# Altium PCB ByteBlaster II.PcbDoc
Units mm, origin at the board's own origin, x right, y up, seen from the top; angles counter-clockwise.
Board outline 50.1 x 27.9 mm, 2 copper layers (Top Layer, Bottom Layer), stack 0.171 mm thick; 46 components, 49 nets, 187 pads, 28 vias.
Unrouted connection lines stored in the file: 1.
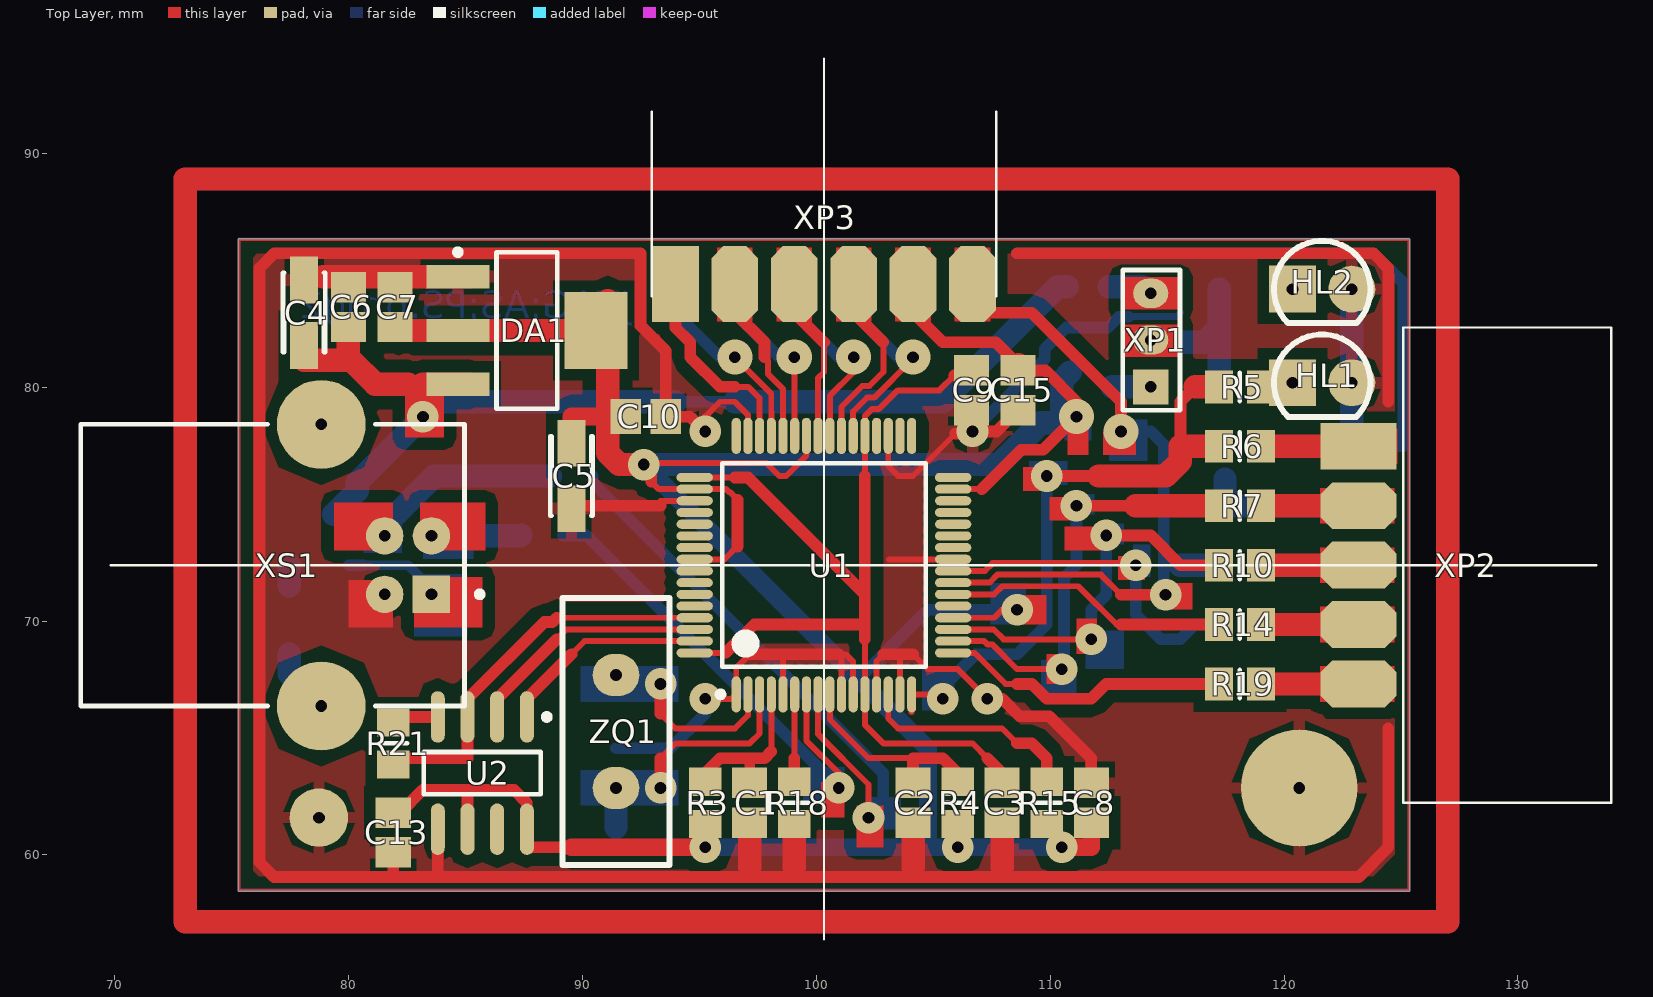
[diagram p0: Top Layer view]
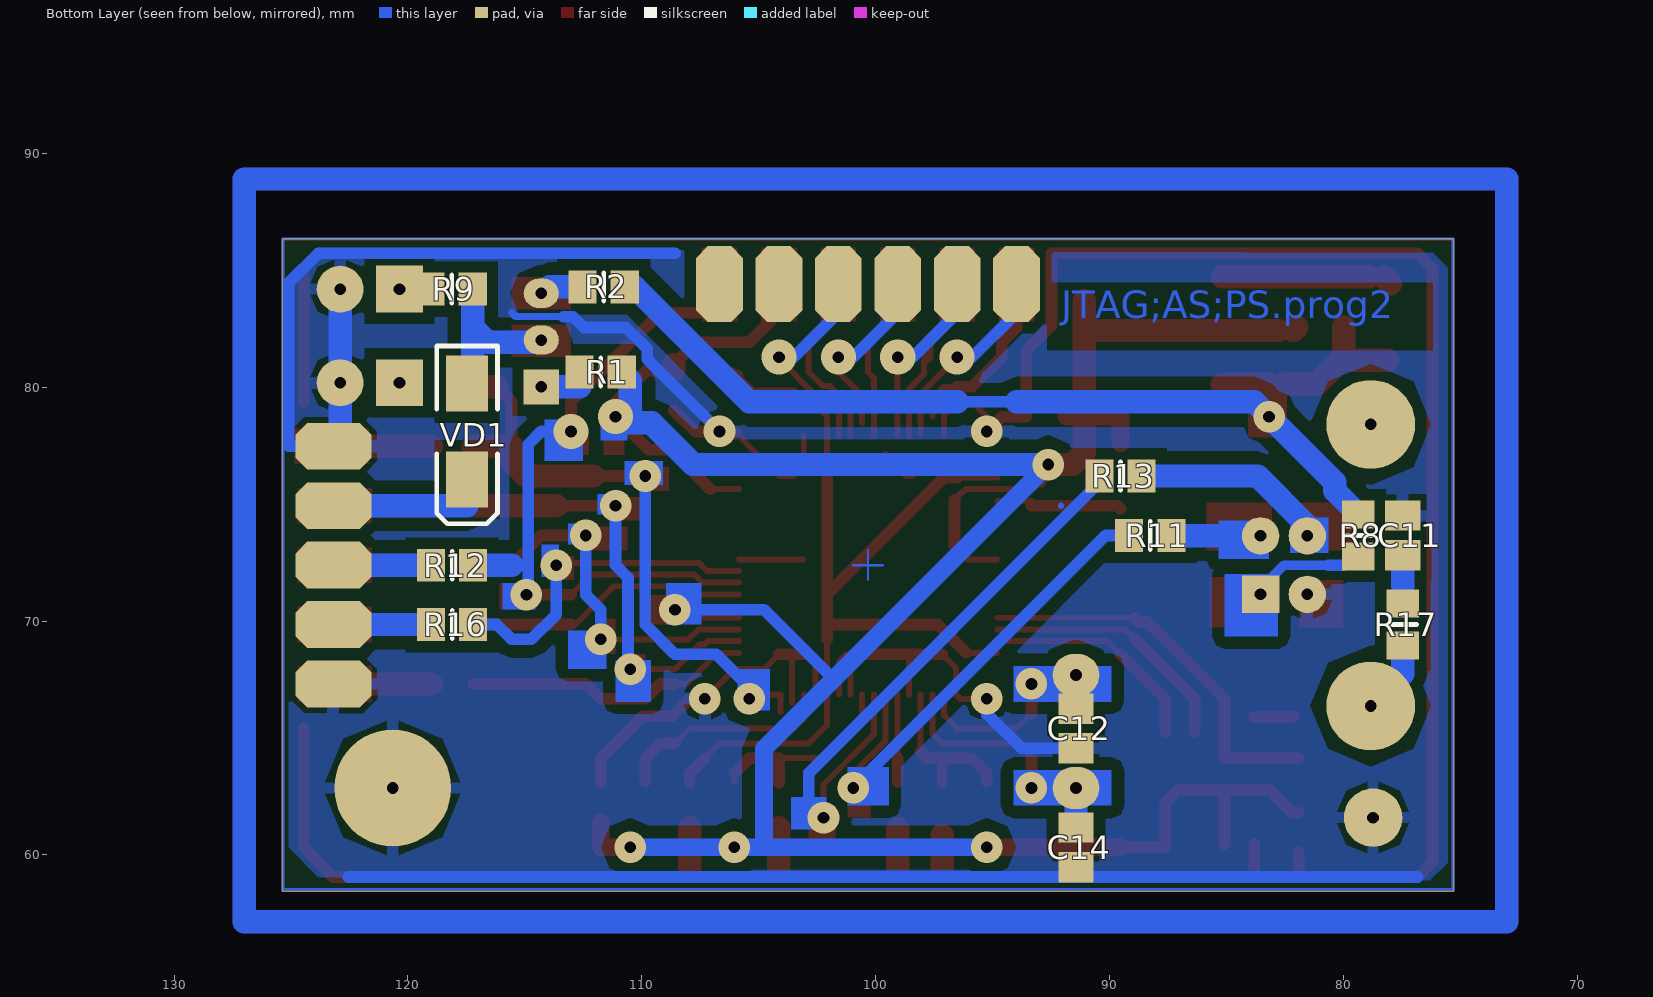
[diagram p1: Bottom Layer view, seen from below]

## Layer stack, top to bottom
Top Solder: solder mask 0.0102, Solder Resist, Dk 3.5
Top Layer: signal copper 0.0356
Dielectric 1: dielectric 0.1, FR-4, Dk 4.8
Bottom Layer: signal copper 0.0356
Bottom Solder: solder mask 0.0102, Solder Resist, Dk 3.5

## Board outline
75.28,58.49 ccw(c75.33,58.49) 75.33,58.44 125.33,58.44 ccw(c125.33,58.49) 125.38,58.49 125.38,86.29 ccw(c125.33,86.29) 125.33,86.34 75.33,86.34 ccw(c75.33,86.29) 75.28,86.29

## Design rules (kind name [scope] priority, off if disabled: settings)
Clearance Clearance_2 [U1] p1: gap=0.2
Clearance Clearance_1 [InNamedPolygon('Bottom Layer-No Net')] p2: gap=0.5
Clearance Clearance_Poly [InPoly] p3: gap=0.5
PolygonConnect [All] p1: connectstyle=Relief reliefconductorwidth=0.5 reliefentries=4 polygonreliefangle="90 Angle" airgapwidth=0.254
RoutingVias [All] p1: holewidth=0.711 width=1.27 viastyle="Through Hole" minholewidth=0.711 minwidth=1.27 maxholewidth=0.711 maxwidth=1.27
SolderMaskExpansion [All] p1: expansion=0.102
Width [All] p1: maxlimit=3 minlimit=0.254 preferedwidth=0.254
30 further rules are at their usual default settings.

## Components (designator, comment, footprint, x,y, rotation, side; value= is the part's Value field where it differs from the comment)
C1 "1uF" CAPC2012(0805)N 97.155,62.23 r90 top
C2 "1uF" CAPC2012(0805)N 104.14,62.23 r90 top
C3 "1uF" CAPC2012(0805)N 107.95,62.23 r90 top
C4 "10uF" CAPC3216(1206)(A) 78.105,83.185 r90 top
C5 "10uF" CAPC3216(1206)(A) 89.535,76.2 r270 top
C6 "0.1uF" CAPC2012(0805)N 79.995,83.42 r270 top
C7 "0.1uF" CAPC2012(0805)N 81.995,83.42 r270 top
C8 "1uF" CAPC2012(0805)N 111.76,62.23 r270 top
C9 "1uF" CAPC2012(0805)N 106.63,79.865 r90 top
C10 "1uF" CAPC2012(0805)N 92.71,78.74 r180 top
C11 "0.1uF" CAPC2012(0805)N 77.47,73.66 r270 bottom
C12 "27p" CAPC2012(0805)N 91.44,65.405 r270 bottom
C13 "0.1uF" CAPC2012(0805)N 81.915,60.96 r90 top
C14 "27p" CAPC2012(0805)N 91.44,60.325 r270 bottom
C15 "0.1uF" CAPC2012(0805)N 108.63,79.865 r90 top
DA1 "LD1117S33T" SOT223_M 87.63,82.42 r0 top
HL1 "LED" "LED 5mm Red" 121.63,80.19 r0 top
HL2 "LED" "LED 5mm Red" 121.63,84.19 r0 top
R1 "30" RESC2012(0805)N 111.76,80.645 r0 bottom
R2 "30" RESC2012(0805)N 111.63,84.285 r0 bottom
R3 "0" RESC2012(0805)N 95.25,62.23 r90 top
R4 "0" RESC2012(0805)N 106.045,62.23 r90 top
R5 "520" RESC2012(0805)N 118.11,80.01 r0 top
R6 "75" RESC2012(0805)N 118.11,77.47 r0 top
R7 "75" RESC2012(0805)N 118.11,74.93 r0 top
R8 "30" RESC2012(0805)N 79.375,73.66 r270 bottom
R9 "520" RESC2012(0805)N 118.13,84.19 r180 bottom
R10 "75" RESC2012(0805)N 118.11,72.39 r0 top
R11 "30" RESC2012(0805)N 88.265,73.66 r180 bottom
R12 "75" RESC2012(0805)N 118.11,72.39 r0 bottom
R13 "30" RESC2012(0805)N 89.535,76.2 r180 bottom
R14 "75" RESC2012(0805)N 118.11,69.85 r0 top
R15 "1k" RESC2012(0805)N 109.855,62.23 r270 top
R16 "75" RESC2012(0805)N 118.11,69.85 r0 bottom
R17 "510k" RESC2012(0805)N 77.47,69.85 r270 bottom
R18 "12k" RESC2012(0805)N 99.06,62.23 r90 top
R19 "75" RESC2012(0805)N 118.11,67.31 r0 top
R21 "2k" RESC2012(0805)N 81.915,64.77 r90 top
U1 "FT2232HL-Reel" LQFP-64_L 100.33,72.39 r90 top locked
U2 "AT93C46DN-SP25-T" 8S1_N 85.725,63.5 r270 top
VD1 "Diode" SMA 117.475,78.105 r270 bottom
XP1 "XP-3_Jump" PLS-3-2 114.3,80.01 r0 top
XP2 "XP-10" BH-10_edge_board 123.19,77.47 r270 top locked
XP3 "PLD-12-2_edge_board" PLD-12-2_edge_board 93.98,84.4 r0 top locked
XS1 "XS-5" USB2.5-2H4D 82.55,72.39 r180 top locked
ZQ1 "12MHz" HC-49/S 91.44,62.865 r90 top

## Footprints (in the part's own frame and the unit in brackets; to place one, negate y for a bottom-side part, rotate by r counter-clockwise, add the part's x,y. Pads: shape width x height; smd on the part's side, far side on the other; paste and mask are expansions set on the pad)
8S1_N [mm] "SOIC, 8-Leads, Body 4.9x3.9mm, Pitch 1.27mm, IPC Medium Density"
  oval 2.2x0.6 smd: 1(-2.4,1.905) 2(-2.4,0.635) 3(-2.4,-0.635) 4(-2.4,-1.905) 5(2.4,-1.905) 6(2.4,-0.635) 7(2.4,0.635) 8(2.4,1.905)
  silkscreen extent -2.52,-2.5 0.9,2.88, body extent -2,-2.5 2,2.5, height 1.75
BH-10_edge_board [mm]
  rect 2x3.25 smd: 1(0,0)
  oct 2x3.25 smd far side: 2(0,0) 4(2.54,0) 6(5.08,0) 8(7.62,0) 10(10.16,0)
  oct 2x3.25 smd: 3(2.54,0) 5(5.08,0) 7(7.62,0) 9(10.16,0)
  silkscreen extent -5.08,1.9 15.24,10.8, body extent -5.17,-1.3 15.33,10.8, height 4.28
CAPC2012(0805)N [mm] "Chip Capacitor, Body 2.0x1.3mm, IPC Medium Density"
  rect 1.3x1.5 smd: 1(-0.85,0) 2(0.85,0)
  body extent -1.02,-0.64 0.98,0.62, height 0.78
CAPC3216(1206)(A) [mm] "Capacitor, SM Tantalum; Body 3.2 x 1.6 mm (LxW typ)"
  rect 2x1.2 smd: 1(-1.4,0) 2(1.4,0)
  silkscreen extent -1.7,-0.9 1.7,0.9
HC-49/S [mm]
  oval 1.8x2 hole 0.5: 1(0,0) 2(4.826,0)
  silkscreen extent -3.3,-2.29 8.13,2.29, body extent -3.26,-2.32 8.08,2.33, height 3.6
"LED 5mm Red" [mm] "красный\матовый"
  rect 2x2 hole 0.5: 1(-1.27,0)
  round 2 hole 0.5: 2(1.27,0)
  silkscreen extent -2.06,-1.46 2.06,2.06, body extent -1.99,-1.5 1.99,1.99, height 5.88
LQFP-64_L [mm] "Thin QFP, 64-Leads, Body 10x10mm, Pitch 0.5mm, IPC High Density"
  oval 1.55x0.39 smd: 1(-5.525,3.75) 2(-5.525,3.25) 3(-5.525,2.75) 4(-5.525,2.25) 5(-5.525,1.75) 6(-5.525,1.25) 7(-5.525,0.75) 8(-5.525,0.25) 9(-5.525,-0.25) 10(-5.525,-0.75) 11(-5.525,-1.25) 12(-5.525,-1.75) 13(-5.525,-2.25) 14(-5.525,-2.75) 15(-5.525,-3.25) 16(-5.525,-3.75) 33(5.525,-3.75) 34(5.525,-3.25) 35(5.525,-2.75) 36(5.525,-2.25) 37(5.525,-1.75) 38(5.525,-1.25) 39(5.525,-0.75) 40(5.525,-0.25) 41(5.525,0.25) 42(5.525,0.75) 43(5.525,1.25) 44(5.525,1.75) 45(5.525,2.25) 46(5.525,2.75) 47(5.525,3.25) 48(5.525,3.75)
  oval 0.39x1.55 smd: 17(-3.75,-5.525) 18(-3.25,-5.525) 19(-2.75,-5.525) 20(-2.25,-5.525) 21(-1.75,-5.525) 22(-1.25,-5.525) 23(-0.75,-5.525) 24(-0.25,-5.525) 25(0.25,-5.525) 26(0.75,-5.525) 27(1.25,-5.525) 28(1.75,-5.525) 29(2.25,-5.525) 30(2.75,-5.525) 31(3.25,-5.525) 32(3.75,-5.525) 49(3.75,5.525) 50(3.25,5.525) 51(2.75,5.525) 52(2.25,5.525) 53(1.75,5.525) 54(1.25,5.525) 55(0.75,5.525) 56(0.25,5.525) 57(-0.25,5.525) 58(-0.75,5.525) 59(-1.25,5.525) 60(-1.75,5.525) 61(-2.25,5.525) 62(-2.75,5.525) 63(-3.25,5.525) 64(-3.75,5.525)
  silkscreen extent -5.65,-4.35 4.35,4.55, body extent -5,-5 5,5, height 1.6
PLD-12-2_edge_board [mm] "Connector; Header; 6x2 Position"
  rect 2x3.25 smd: 1(0,0)
  oct 2x3.25 smd far side: 2(0,0) 4(2.54,0) 6(5.08,0) 8(7.62,0) 10(10.16,0) 12(12.7,0)
  oct 2x3.25 smd: 3(2.54,0) 5(5.08,0) 7(7.62,0) 9(10.16,0) 11(12.7,0)
  silkscreen extent -1.02,-0.51 13.72,7.37, body extent -1,-0.59 13.7,7.41, height 2.1
PLS-3-2 [mm] "Connector; Header; 1x3 Position"
  rect 1.5x1.5 hole 0.5: 1(0,0)
  oval 1.5x1.25 hole 0.5: 2(0,2) 3(0,4)
  silkscreen extent -1.2,-1 1.25,5, body extent -1.2,-1 1.2,5, height 5.5
RESC2012(0805)N [mm] "Chip Resistor, Body 2.0x1.3mm, IPC Medium Density"
  rect 1.2x1.4 smd: 1(-0.9,0) 2(0.9,0)
  silkscreen extent 0,-0.6 0,0.6, body extent -1,-0.62 1,0.63, height 0.78
SMA [mm] "DO-214-AC/SMA; 2 C-Bend Leads; Body 5 x 2.7 mm, inc. leads (LxW)"
  rect 2.4x1.8 smd: 1(-2.05,0) 2(2.05,0)
  silkscreen extent -3.65,-1.3 3.95,1.3, body extent -2.75,-1.4 2.75,1.4, height 2.6
SOT223_M [mm] "SOT223, 4-Leads, Body 6.5x3.5mm, Pitch 2.3mm, Lead Span 7mm, IPC Low Density"
  rect 2.7x1 smd: 1(-2.95,2.3) 2(-2.95,0) 3(-2.95,-2.3)
  rect 2.7x3.3 smd: 4(2.95,0)
  silkscreen extent -3.07,-3.35 1.3,3.47, body extent -1.85,-3.35 1.85,3.35, height 1.7
USB2.5-2H4D [mm] "Connector; USB1.1, Type B, Thru-Hole; 4 Position; Right Angle"
  rect 1.6x1.6 hole 0.5: 1(-1,1.25)
  round 1.6 hole 0.5: 2(-1,-1.25) 3(1,-1.25) 4(1,1.25)
  round 3.8 hole 0.5: 5(3.71,6.02) 6(3.71,-6.02)
  silkscreen extent -3.18,-6.02 13.99,6.02, body extent -2.41,-6.02 13.99,6.02, height 11.1

## Part data
C1 C2 C3 C6 C7 C8 C9 C10 C11 C12 C13 C14 C15: library part CAPCC2012[0805]
C4 C5: library part CapTantA
HL1 HL2: library part "FYL-5013 HD"
R1 R2 R3 R4 R5 R6 R7 R8 R9 R10 R11 R12 R13 R14 R15 R16 R17 R18 R19 R21: library part RESC3216(1206), "Resistor"
U1: library part FT2232HL-R, "Dual High Speed USB To Multipurpose UART/FIFO IC, LQFP-64, Tape and Reel"
U2: "1Kbit (128 x 8 or 64 x 16), 3-wire Bus Serial Automotive EEPROM, 2.5V, 8-Pin SOIC, Tape & Reel"
VD1: library part SS14, "Диод Шоттки 1A 40В [SMA / DO-214AC]"
XP2: library part BH-10_edge_board
XS1: library part USB2.5-2H4D
ZQ1: library part "Crystal HC-49/S"

## Free pads (board coordinates)
  round 2.5 hole 0.5: 0(78.74,61.595)
  round 5 hole 0.5: 0(120.65,62.865)

## Via types
v1: diameter 1.35, hole 0.5, Top Layer to Bottom Layer, 22 vias
v2: diameter 1.5, hole 0.5, Top Layer to Bottom Layer, 6 vias

## Nets (pads, with @x,y where several pads share a name; then routed paths per layer and width w, separated by ;. In a path a pad name is that pad's centre, name@x,y a point inside that pad or via, vN(x,y) a via of type N, cw(c..) or ccw(c..) an arc to the next point about the centre after c; other vN are vias at no path point)
+1.8V: C3.2 C9.2 U1.12 U1.37 U1.49 U1.64 | length 44.8
  Top Layer w0.254: U1.64 96.135,68.64 ; U1.49 96.52,76.14 ; 102.03,71.19 102.08,71.19 ; 102.08,69.215 U1.12 102.08,65.56 102.87,64.77 106.68,64.77 107.315,64.135 ; 102.08,75.74 102.08,77.015 ; 102.08,76.2 102.08,77.015 ; C9.2 106.115,80.715 105.9,80.5 105.265,79.865 103.487,79.865 102.679,79.057 102.376,79.057 102.08,78.761 U1.37 102.08,77.015
  Top Layer w0.5: 96.135,68.64 97.345,69.85 102.08,69.85 ; 96.52,76.14 97.08,76.14 102.03,71.19 102.08,71.14 102.08,69.85 ; 102.08,69.215 102.08,69.85 ; 102.08,71.19 102.08,76.2 ; C9.2@105.9,80.5 C9.2@106.63,80.5 ; 107.315,64.135 107.95,63.5 C3.2
+3.3V: C5.1 C7.2 C8.2 C10.2 C13.2 C15.2 DA1.2 DA1.4 R1.1 R3.1 R4.1 R15.2 U1.20 U1.31 U1.42 U1.50 U1.56 U2.6 U2.8 XP3.9 | length 142.2
  Top Layer w0.254: 92.95,75.96 93.27,75.64 U1.50 96.147,75.64 96.264,75.523 96.297,75.523 96.63,75.19 ; v1@93.12,76.757 97.868,76.757 98.425,76.2 98.711,76.2 99.572,77.061 99.572,77.132 99.58,77.14 ; U1.56 96.08,72.64 96.63,73.19 ; XP3.9@104.14,83.86 XP3.9@104.14,84.455 ; U1.20 107.605,70.14 107.95,70.485 v1(108.585,70.485) ; U1.31 107.08,75.64
  Top Layer w0.5: C13.2 82.215,61.81 83.185,62.78 85.09,62.78 ; U2.6@85.09,60.465 U2.6 85.09,62.78 ; U2.8@87.63,60.325 89.535,60.325 ; U2.8@87.63,60.465 U2.8 87.63,62.23 87.08,62.78 85.09,62.78 ; v1(92.63,76.69) 92.95,76.37 92.95,75.96 ; 96.63,73.19 96.63,75.19 ; XP3.9@104.14,83.86 104.14,83.185 105.41,81.915 107.68,81.915 C15.2@108.63,80.965 ; 107.08,75.64 108.765,77.325 109.71,77.325 v2(111.125,78.74) 111.125,79.375 109.785,80.715 C15.2
  Top Layer w0.762: 89.535,60.325 v1(95.25,60.325) ; C5.1 89.535,78.74 91.08,78.74 C10.2 ; v1(110.49,60.325) 111.76,60.325 C8.2
  Top Layer w1: C7.2 C7.2@82.145,82.42 ; 82.78,82.42 DA1.4@91.08,82.42 ; DA1.4@91.08,83.69 DA1.4@91.08,82.42 ; v1(92.63,76.69) 91.585,76.69 91.08,77.195 91.08,78.74 DA1.4@91.08,82.42 ; C15.2 C15.2@108.63,80.965
  Bottom Layer w0.5: 101.805,67.515 104.775,70.485 v1(108.585,70.485)
  Bottom Layer w0.762: v1(92.63,76.69) 101.805,67.515 104.775,64.545 104.775,60.325 ; v1(95.25,60.325) 104.775,60.325 ; v1(110.49,60.325) 104.775,60.325
  Bottom Layer w1: v1(92.63,76.69) 107.805,76.69 109.585,78.47 110.49,78.47 110.49,80.275 R1.1
  other v1: 106.045,60.325
+5V: C4.1 C6.2 DA1.3 R2.1 R8.1 | length 45.1
  Top Layer w1: C4.1@78.105,81.15 80.125,81.15 81.155,80.12 82.55,80.12 ; 79.995,81.28 C6.2 ; v1(83.185,78.74) 83.185,80.12 DA1.3@85.18,80.12
  Bottom Layer w0.5: 93.98,79.375 96.52,79.375
  Bottom Layer w1: R8.1 80.38,75.565 80.38,75.935 83.82,79.375 93.98,79.375 ; 96.52,79.375 105.41,79.375 110.32,84.285 R2.1
GND: C1.1 C2.1 C3.1 C4.2 C5.2 C6.1 C7.1 C8.1 C9.1 C10.1 C11.1 C12.2 C13.1 C14.2 C15.1 DA1.1 HL1.2 HL2.2 pad.0 R18.1 U1.1 U1.5 U1.10 U1.11 U1.13 U1.15 U1.25 U1.35 U1.47 U1.51 U2.5 XP2.2 XP2.10 XS1.4 | length 442.9
  Top Layer w0.254: 93.345,75.14 U1.51 ; v1(95.25,66.675) 96.39,66.675 U1.1 96.58,68.005 97.155,68.58 ; v1(95.25,78.105) 95.25,78.74 95.885,79.375 96.52,79.375 97.078,78.817 97.078,77.917 U1.47 ; 98.425,68.58 98.58,68.425 U1.5 ; U1.10 101.08,68.465 100.965,68.58 101.263,68.58 101.58,68.263 U1.11 ; U1.13 102.58,68.29 102.87,68.58 ; U1.35 103.08,76.625 103.505,76.2 104.14,76.2 105.955,78.015 106.195,78.255 v1@106.57,78.255 ; 103.12,72.64 U1.25 ; 103.505,68.58 103.58,68.505 U1.15 U1.15@103.58,66.523 ; 104.14,68.58 104.775,67.945 106.045,67.945 v1(107.315,66.675) ; v1@106.33,78.015 v1@106.57,78.255 ; v1@106.63,78.315 v1@106.57,78.255 ; v1@106.68,78.255 v1@106.57,78.255
  Top Layer w0.5: C13.1 81.915,59.055 ; U2.5@83.82,60.465 83.82,59.055 ; C5.2 89.665,74.93 92.075,74.93 93.345,74.93 ; v1(95.25,78.105) 94.615,78.74 C10.1 93.56,81.557 92.49,82.627 92.49,85.711 92.476,85.725 76.835,85.725 76.2,85.09 76.2,59.69 76.835,59.055 81.915,59.055 ; 97.155,68.58 98.425,68.58 100.965,68.58 ; 102.87,68.58 103.505,68.58 104.14,68.58 ; 105.955,78.015 v1@106.33,78.015 ; v1(106.68,78.105) 107.72,78.105 C15.1 ; v1@106.68,78.255 v1@106.77,78.165 ; v1(107.315,66.675) 107.95,66.675 108.69,65.935 109.96,65.935 111.76,64.135 C8.1 ; 108.585,85.725 123.825,85.725 124.46,85.09 124.46,79.375 ; 124.46,65.405 124.46,60.325 123.19,59.055 83.82,59.055 ; 81.915,59.055 83.82,59.055
  Top Layer w1: C4.2@77.995,84.42 C4.2@78.295,84.72 ; 78.93,84.72 DA1.1@85.18,84.72 ; 97.155,59.475 C1.1@97.155,60.834 ; 99.06,59.475 R18.1@99.06,61.115 ; 104.14,59.475 C2.1@104.14,61.165 ; 107.95,59.475 C3.1@107.95,61.165
  Bottom Layer w0.1: 75.33,58.54 75.33,86.34 125.33,86.34 125.33,58.54 75.33,58.54
  Bottom Layer w0.254: 92.075,74.925 92.075,74.93
  Bottom Layer w0.3: 113.352,83.01 115.395,83.01 115.57,83.185
  Bottom Layer w0.5: 76.835,59.055 122.555,59.055 ; C12.2 93.765,64.555 95.25,66.04 v1(95.25,66.675) ; v1(106.68,78.105) 109.77,81.195 109.77,81.633 110.687,82.55 112.485,82.55 112.945,83.01 113.352,83.01 ; 108.585,85.725 123.825,85.725 125.095,84.455 125.095,77.47 XP2.2
  Bottom Layer w1: XP2.2@122.555,77.47 122.9,77.815 HL1.2 HL2.2
LAMP1: HL2.1 R9.1
NetC1_2: C1.2 R3.2 U1.4 | length 7.1
  Top Layer w0.254: 98.08,64.425 U1.4
  Top Layer w0.45: C1.2 97.155,64.135
  Top Layer w0.5: R3.2 95.25,63.5 95.885,64.135 97.155,64.135 97.79,64.135 98.08,64.425
NetC2_2: C2.2 R4.2 U1.9 | length 8.9
  Top Layer w0.254: U1.9 100.58,65.79 102.235,64.135 103.505,64.135 104.14,64.135 ; R4.2 R4.2@106.045,63.5
  Top Layer w0.5: C2.2 104.14,64.135 105.41,64.135 R4.2@106.045,63.5
NetC11_2: C11.2 R17.1 | length 0.9
  Bottom Layer w1: 77.47,71.515 C11.2@77.47,72.39
NetC12_1: C12.1 U1.2 ZQ1.2 | length 8.5
  Top Layer w0.254: 93.345,66.04 93.98,65.405 96.52,65.405 97.08,65.965 U1.2
  Top Layer w0.5: 93.345,66.04 v1(93.345,67.31)
  Bottom Layer w1: ZQ1.2 91.821,67.31 v1(93.345,67.31)
NetC14_1: C14.1 U1.3 ZQ1.1 | length 11.2
  Top Layer w0.254: 93.345,64.135 93.98,64.77 97.155,64.77 97.58,65.195 U1.3
  Top Layer w0.5: v1(93.345,62.865) 93.345,64.135
  Bottom Layer w1: C14.1 ZQ1.1 v1(93.345,62.865)
NetHL1_1: HL1.1 R5.2
NetR1_2: R1.2 XP1.1 | length 1.6
  Bottom Layer w1: R1.2@112.66,80.01 XP1.1
NetR2_2: R2.2 XP1.3 | length 1.9
  Bottom Layer w1: R2.2 113.94,84.285 114.215,84.01 XP1.3
NetR5_1: R5.1 R6.1 U1.16 | length 26.6
  Top Layer w0.254: U1.16@104.08,66.1 U1.16 104.965,66.865 105.155,66.675 v1(105.41,66.675)
  Top Layer w0.5: v1(109.855,76.2) 112.078,76.2 ; 115.57,77.47 115.57,79.375 116.205,80.01
  Top Layer w1: 112.078,76.2 114.935,76.2 115.57,76.835 115.57,77.47 R6.1 ; 116.205,80.01 R5.1
  Bottom Layer w0.5: v1(105.41,66.675) 105.41,67.165 106.825,68.58 108.585,68.58 109.855,69.85 v1(109.855,76.2)
NetR6_2: R6.2 XP2.1 | length 3.5
  Top Layer w1: R6.2 XP2.1@122.555,77.47
NetR7_1: R7.1 U1.18 | length 18.5
  Top Layer w0.254: U1.18 107.179,69.14 107.33,68.989 107.541,68.989 108.585,67.945 v1(110.49,67.945)
  Top Layer w0.5: v1(111.125,74.93) 113.665,74.93
  Top Layer w1: 113.665,74.93 R7.1
  Bottom Layer w0.5: v1(110.49,67.945) 110.595,68.05 110.595,71.86 111.125,72.39 v1(111.125,74.93)
NetR7_2: R7.2 XP2.3 | length 3.5
  Top Layer w1: R7.2 XP2.3@122.555,74.93
NetR8_2: R8.2 XS1.1 | length 5.1
  Bottom Layer w0.4: 80.645,72.39 82.55,72.39 83.55,71.39 XS1.1
  Bottom Layer w0.5: R8.2@80.01,72.39 80.645,72.39 ; XS1.1 XS1.1@84.185,70.505
NetR9_2: R9.2 VD1.1 XP1.2 | length 7.3
  Bottom Layer w1: XP1.2@114.348,81.963 114.395,81.915 116.595,81.915 117.23,82.55 ; R9.2 117.23,82.55 ; VD1.1 117.23,80.4 117.23,82.55
NetR10_1: R10.1 U1.19 | length 16.1
  Top Layer w0.254: U1.19 107.589,69.64 108.014,69.215 v1(111.76,69.215)
  Top Layer w0.5: v1(112.395,73.66) 114.3,73.66 115.57,72.39 R10.1
  Bottom Layer w0.5: v1(111.76,69.215) 111.76,70.485 112.395,71.12 v1(112.395,73.66)
NetR10_2: R10.2 XP2.5 | length 3.5
  Top Layer w1: R10.2 XP2.5@122.555,72.39
NetR11_1: R11.1 U1.7 | length 20.8
  Top Layer w0.254: U1.7 99.58,64.885 100.965,63.5 v1(100.965,62.865)
  Bottom Layer w0.5: R11.1 90.17,73.66 v1(100.965,62.865)
NetR11_2: R11.2 XS1.2 | length 3.8
  Bottom Layer w1: XS1.2 87.345,73.64 R11.2
NetR12_1: R12.1 U1.23 XP3.11 | length 30.9
  Top Layer w0.254: U1.23 107.404,71.64 107.745,71.981 112.169,71.981 113.03,71.12
  Top Layer w0.5: XP3.11@106.68,84.455 106.68,83.185 109.22,83.185 113.03,79.375 v2(113.03,78.105) ; 113.03,71.12 v1(114.935,71.12)
  Bottom Layer w0.5: v2(113.03,78.105) 114.3,78.105 114.857,77.548 114.857,72.39 ; v1(114.935,71.12) 114.857,71.198 114.857,72.39 ; 115.57,72.39 114.857,72.39
  Bottom Layer w1: 115.57,72.39 R12.1
NetR12_2: R12.2 XP2.6 | length 3.5
  Bottom Layer w1: R12.2 XP2.6@122.555,72.39
NetR13_1: R13.1 U1.8 | length 26.2
  Top Layer w0.254: U1.8 100.08,65.167 102.235,63.012 v1(102.235,61.595)
  Bottom Layer w0.5: R13.1 90.435,75.935 102.87,63.5 102.87,62.23 v1(102.235,61.595)
NetR13_2: R13.2 XS1.3 | length 8.4
  Bottom Layer w1: XS1.3 81.55,74.074 83.676,76.2 R13.2
NetR14_1: R14.1 U1.22 | length 13.8
  Top Layer w0.254: U1.22 107.603,71.14 107.95,71.487 111.206,71.487 112.843,69.85 113.03,69.85 ; 115.57,69.85 R14.1
  Top Layer w0.5: 113.03,69.85 R14.1
NetR14_2: R14.2 XP2.7 | length 3.5
  Top Layer w1: R14.2 XP2.7@122.555,69.85
NetR15_1: R15.1 U1.14 | length 9.5
  Top Layer w0.254: U1.14 103.08,65.83 103.505,65.405 107.95,65.405 108.585,64.77
  Top Layer w0.5: 108.585,64.77 109.22,64.77 109.855,64.135 R15.1
NetR16_1: R16.1 U1.24 | length 14.3
  Top Layer w0.254: U1.24 107.206,72.14 107.541,72.475 113.58,72.475 v1(113.665,72.39)
  Bottom Layer w0.5: v1(113.665,72.39) 113.665,70.276 114.726,69.215 115.57,69.215 116.205,69.85 R16.1
NetR16_2: R16.2 XP2.8 | length 3.5
  Bottom Layer w1: R16.2 XP2.8@122.555,69.85
NetR17_2: R17.2 XS1.5 | length 2.8
  Bottom Layer w1: R17.2@77.47,68.58 77.47,67.74 XS1.5
NetR18_2: R18.2 U1.6 | length 3.7
  Top Layer w0.254: 99.08,64.135 U1.6
  Top Layer w0.5: R18.2 99.06,64.135
NetR19_1: R19.1 U1.17 | length 12.4
  Top Layer w0.254: U1.17 106.767,68.64 108.097,67.31 108.585,67.31
  Top Layer w0.5: 108.585,67.31 109.22,67.31 109.855,66.675 111.76,66.675 112.395,67.31 R19.1
NetR19_2: R19.2 XP2.9 | length 3.5
  Top Layer w1: R19.2 XP2.9@122.555,67.31
NetR20_2: R21.1 U1.61 U2.3 | length 16.9
  Top Layer w0.254: 88.9,70.14 U1.61
  Top Layer w0.5: R21.1@81.915,64.135 85.09,64.135 85.09,66.675 88.37,69.955 88.715,69.955 88.9,70.14
NetR21_2: R21.2 U2.4 | length 1.7
  Top Layer w0.5: R21.2@82.145,65.9 U2.4
NetU1_38: U1.38 XP3.8 | length 9.8
  Top Layer w0.254: U1.38 101.58,78.959 102.172,79.551 102.475,79.551 104.14,81.216 v2(104.14,81.28)
  Bottom Layer w0.5: XP3.8@101.6,85.09 101.6,84.455 101.6,83.185 103.505,81.28 v2(104.14,81.28)
NetU1_39: U1.39 XP3.7 | length 8
  Top Layer w0.254: U1.39 101.08,79.158 101.967,80.045 102.27,80.045 102.87,80.645 102.87,81.915
  Top Layer w0.5: XP3.7@101.6,84.455 101.6,83.185 102.87,81.915
NetU1_40: U1.40 XP3.6 | length 8.5
  Top Layer w0.254: U1.40@100.58,78.465 100.58,79.625 101.6,80.645 v2(101.6,81.28)
  Bottom Layer w0.5: XP3.6@99.06,85.09 99.06,83.185 100.965,81.28 v2(101.6,81.28)
NetU1_41: U1.41 XP3.5 | length 7.2
  Top Layer w0.254: U1.41 100.08,80.395 100.33,80.645 100.33,81.915
  Top Layer w0.5: XP3.5@99.06,84.455 99.06,83.185 100.33,81.915
NetU1_43: U1.43 XP3.4 | length 7.7
  Top Layer w0.254: v2(99.06,81.28) 99.08,81.26 U1.43
  Bottom Layer w0.5: XP3.4@96.52,84.185 96.52,83.185 98.425,81.28 v2(99.06,81.28)
NetU1_44: U1.44 XP3.3 | length 7.4
  Top Layer w0.254: 97.79,81.28 97.933,81.137 97.933,80.566 98.57,79.929 98.57,79.865 98.58,79.855 U1.44
  Top Layer w0.5: XP3.3@96.52,84.455 96.52,83.185 97.79,81.915 97.79,81.28
NetU1_45: U1.45 XP3.2 | length 9.1
  Top Layer w0.254: v2(96.52,81.28) 98.076,79.724 98.076,78.943 98.08,78.939 98.08,78.529 98.076,78.525 U1.45@98.076,78.015
  Bottom Layer w0.254: XP3.2@93.98,83.185 XP3.2@93.98,85.09 ; v2@95.885,81.28 v2(96.52,81.28)
  Bottom Layer w0.5: XP3.2@93.98,83.185 v2@95.885,81.28
NetU1_46: U1.46 XP3.1 | length 7.9
  Top Layer w0.254: 96.52,80.01 97.091,80.01 97.572,79.529 97.572,78.748 97.586,78.734
  Top Layer w0.5: XP3.1@93.98,84.455 93.98,82.55 94.615,81.915 94.615,81.28 95.885,80.01 96.52,80.01
NetU1_62: U1.62 U2.2 | length 11.1
  Top Layer w0.254: 88.9,69.215 89.325,69.64 U1.62
  Top Layer w0.5: U2.2@86.36,65.265 86.36,66.675 88.9,69.215
NetU1_63: U1.63 U2.1 | length 9.6
  Top Layer w0.254: 89.535,68.58 90.095,69.14 U1.63
  Top Layer w0.5: U2.1@87.63,65.265 87.63,66.675 89.535,68.58
NetVD1_2: VD1.2 XP2.4 | length 6.2
  Bottom Layer w1: VD1.2 117.475,74.93 XP2.4@122.555,74.93
pads on no net: U1.21 U1.26 U1.27 U1.28 U1.29 U1.30 U1.32 U1.33 U1.34 U1.36 U1.48 U1.52 U1.53 U1.54 U1.55 U1.57 U1.58 U1.59 U1.60 U2.7 XP3.10 XP3.12 XS1.6
copper on no net: | length 503.6
  Top Layer w0.1: 99.695,72.39 100.83,72.39 ; 100.33,71.755 100.33,72.89 ; 125.33,72.39 125.33,86.29 75.33,86.29 75.33,72.39 75.33,58.49 125.33,58.49 125.33,72.69
  Top Layer w1: 73.025,57.15 127,57.15 127,88.9 73.025,88.9 73.025,57.15
  Bottom Layer w0.1: 99.695,72.39 100.965,72.39 ; 100.33,71.755 100.33,73.025
  Bottom Layer w1: 73.025,57.15 73.025,88.9 127,88.9 127,57.15 73.025,57.15

## Polygon pours and split planes (outlines as drawn)
GND on Bottom Layer "Bottom Layer-No Net" (solid, remove dead copper, pour order 3): 76.182,85.743 123.66,85.89 125.095,84.455 125.095,60.325 123.825,59.055 76.33,58.89 75.548,59.673 75.548,85.108
GND on Top Layer "Bottom Layer-No Net" (solid, remove dead copper, pour order 4): 76.167,85.781 123.644,85.929 125.079,84.494 125.079,60.364 123.809,59.094 76.314,58.929 75.532,59.711 75.532,85.146

## Other copper
Top Layer:
  rectangle net NetR16_1: 112.903,71.755 114.046,72.771
  rectangle net NetR9_2: 113.03,81.28 115.57,82.677
  rectangle net NetR2_2: 113.03,83.312 115.57,84.709
  rectangle net NetR12_1: 114.681,70.485 116.078,71.628
  rectangle net NetR13_1: 101.727,60.325 102.87,62.103
  rectangle net NetR11_1: 100.203,61.595 101.219,63.119
  rectangle net GND: 80.01,69.723 81.915,71.755
  rectangle net NetR8_2: 82.804,69.723 85.725,71.882
  rectangle net NetR11_2: 83.058,73.025 85.852,75.057
  rectangle net NetR13_2: 79.375,73.025 81.915,75.057
  rectangle net +5V: 82.423,77.841 84.084,79.629
  rectangle net +3.3V: 110.744,77.089 111.633,78.613
  rectangle net NetR12_1: 112.268,77.089 113.665,78.105
  rectangle net NetR5_1: 108.839,75.565 109.982,76.581
  rectangle net NetR10_1: 110.617,73.025 112.522,74.041
  rectangle net NetR7_1: 109.982,74.295 111.379,75.311
  rectangle net NetR7_1: 109.855,67.31 110.49,68.58
  rectangle net NetR10_1: 111.125,68.58 112.014,70.104
  rectangle net +3.3V: 108.585,69.85 109.855,71.12
  rectangle net NetU1_44: 95.758,82.804 97.282,85.979
  rectangle net NetU1_41: 98.298,82.804 99.822,85.979
  rectangle net NetU1_39: 100.838,82.804 102.362,85.979
  rectangle net +3.3V: 103.378,82.804 104.902,85.979
  rectangle net NetR12_1: 105.918,82.804 107.442,85.979
  region net NetR6_2: 124.841,76.708 124.841,78.232 121.666,78.232 121.666,76.708
  region net NetR7_2: 121.539,75.692 121.539,74.168 124.714,74.168 124.714,75.692
  region net NetR10_2: 121.539,73.152 121.539,71.628 124.714,71.628 124.714,73.152
  rectangle net NetU1_46: 93.218,82.804 94.742,85.979
  region net NetR14_2: 121.539,70.612 121.539,69.088 124.714,69.088 124.714,70.612
  region net NetR19_2: 121.539,68.072 121.539,66.548 124.714,66.548 124.714,68.072
Bottom Layer:
  rectangle net +3.3V: 110.617,77.724 111.76,78.867
  rectangle net NetR12_1: 112.522,76.835 114.173,78.613
  rectangle net NetR10_1: 111.506,67.945 113.157,69.596
  rectangle net NetR7_1: 109.601,66.548 111.125,68.326
  rectangle net NetR13_2: 80.645,72.898 82.296,74.422
  rectangle net NetR11_2: 83.185,72.644 85.344,74.295
  rectangle net NetR8_2: 82.804,69.342 85.09,72.009
  rectangle net NetC12_1: 89.916,66.548 94.107,68.072
  rectangle net NetC14_1: 89.916,62.103 94.107,63.627
  rectangle net NetR13_1: 102.108,61.087 103.632,62.484
  rectangle net NetR11_1: 99.441,62.103 101.219,63.754
  rectangle net NetR5_1: 104.521,66.167 105.918,67.945
  rectangle net +3.3V: 107.442,69.85 108.966,71.628
  rectangle net NetR12_1: 114.554,70.485 115.951,71.628
  rectangle net NetR16_1: 113.538,71.882 114.3,73.279
  rectangle net NetR10_1: 111.887,73.279 113.157,74.168
  rectangle net NetR7_1: 110.617,74.549 111.887,75.438
  rectangle net NetR5_1: 109.093,75.819 110.744,76.835
  text "JTAG;AS;PS.prog2" at 92.075,82.55 h2

## Silkscreen, mask and mechanical layers (free items; w line width, h text height)
Top Overlay:
  lines w0.1: 69.83,72.39 133.35,72.39 ; 100.33,56.39 100.33,94.035
Mechanical 1:
  circle w0.1: c121.2,117.5 r2.875
  circle w0.1: c124.5,107.6 r2
  circle w0.1: c124.5,127.4 r2
  circle w0.1: c110.83,82.29 r2
  circle w0.1: c112.735,62.49 r2
  circle w0.1: c107.53,72.39 r2.875
  circle w0.1: c178.5,90.4 r2
  circle w0.1: c178.5,70.6 r2
  circle w0.1: c175.2,80.5 r2.875
  lines w0.1: 74.695,64.79 80.495,64.79 ; 75.33,64.79 75.33,79.99 81.13,79.99 81.13,64.79 ; 75.33,72.39 125.33,72.39 ; 113.43,72.39 121.33,72.39 ; 113.5,117 114,117.5 ; 114.5,117 113.5,118 ; 114.5,118 114,117.5 ; 127.1,117.5 135,117.5 ; 139,117.8 139,103.6 89,103.6 89,117.5 ; 167.5,80 168,80.5 ; 168.5,80 167.5,81 ; 168.5,81 168,80.5 ; 181.1,80.5 189,80.5 ; 193,80.8 193,66.6 143,66.6 143,80.5 ; 89,117.5 89,131.4 139,131.4 139,117.5 89,117.5 ; 99.83,72.89 100.83,71.89 99.83,72.89 ; 99.83,72.89 100.33,72.39 ; 99.83,72.89 99.83,72.89 ; 100.33,72.39 100.33,72.39 ; 100.33,72.39 99.83,71.89 100.83,72.89 100.33,72.39 ; 113.5,118 113.5,118 ; 113.5,118 114,117.5 ; 114,117.5 114,117.5 ; 143,80.5 193,80.5 193,94.4 143,94.4 143,80.5 ; 167.5,81 168,80.5 ; 167.5,81 167.5,81 ; 168,80.5 168,80.5 ; 75.695,60.16 75.695,60.16 ; 89,109.9 89,125.1 94.8,125.1 94.8,109.9 89,109.9 ; 113.43,70.49 115.48,70.49 115.48,68.44 119.28,68.44 119.28,70.49 121.33,70.49 121.33,74.29 119.28,74.29 119.28,76.34 115.48,76.34 115.48,74.29 113.43,74.29 113.43,70.49 ; 127.1,115.6 127.1,119.4 129.15,119.4 129.15,121.45 132.95,121.45 132.95,119.4 135,119.4 135,115.6 132.95,115.6 132.95,113.55 129.15,113.55 129.15,115.6 127.1,115.6 ; 143,72.9 148.8,72.9 148.8,88.1 143,88.1 143,72.9 ; 181.1,78.6 183.15,78.6 183.15,76.55 186.95,76.55 186.95,78.6 189,78.6 189,82.4 186.95,82.4 186.95,84.45 183.15,84.45 183.15,82.4 181.1,82.4 181.1,78.6